# Altium PCB GPS.PcbDoc
Units mil, origin at the board's own origin, x right, y up, seen from the top; angles counter-clockwise.
Board outline 1968.5 x 2421.26 mil, 4 copper layers (Top Layer, GND, VDD, Bottom Layer); 60 components, 46 nets, 265 pads, 133 vias.
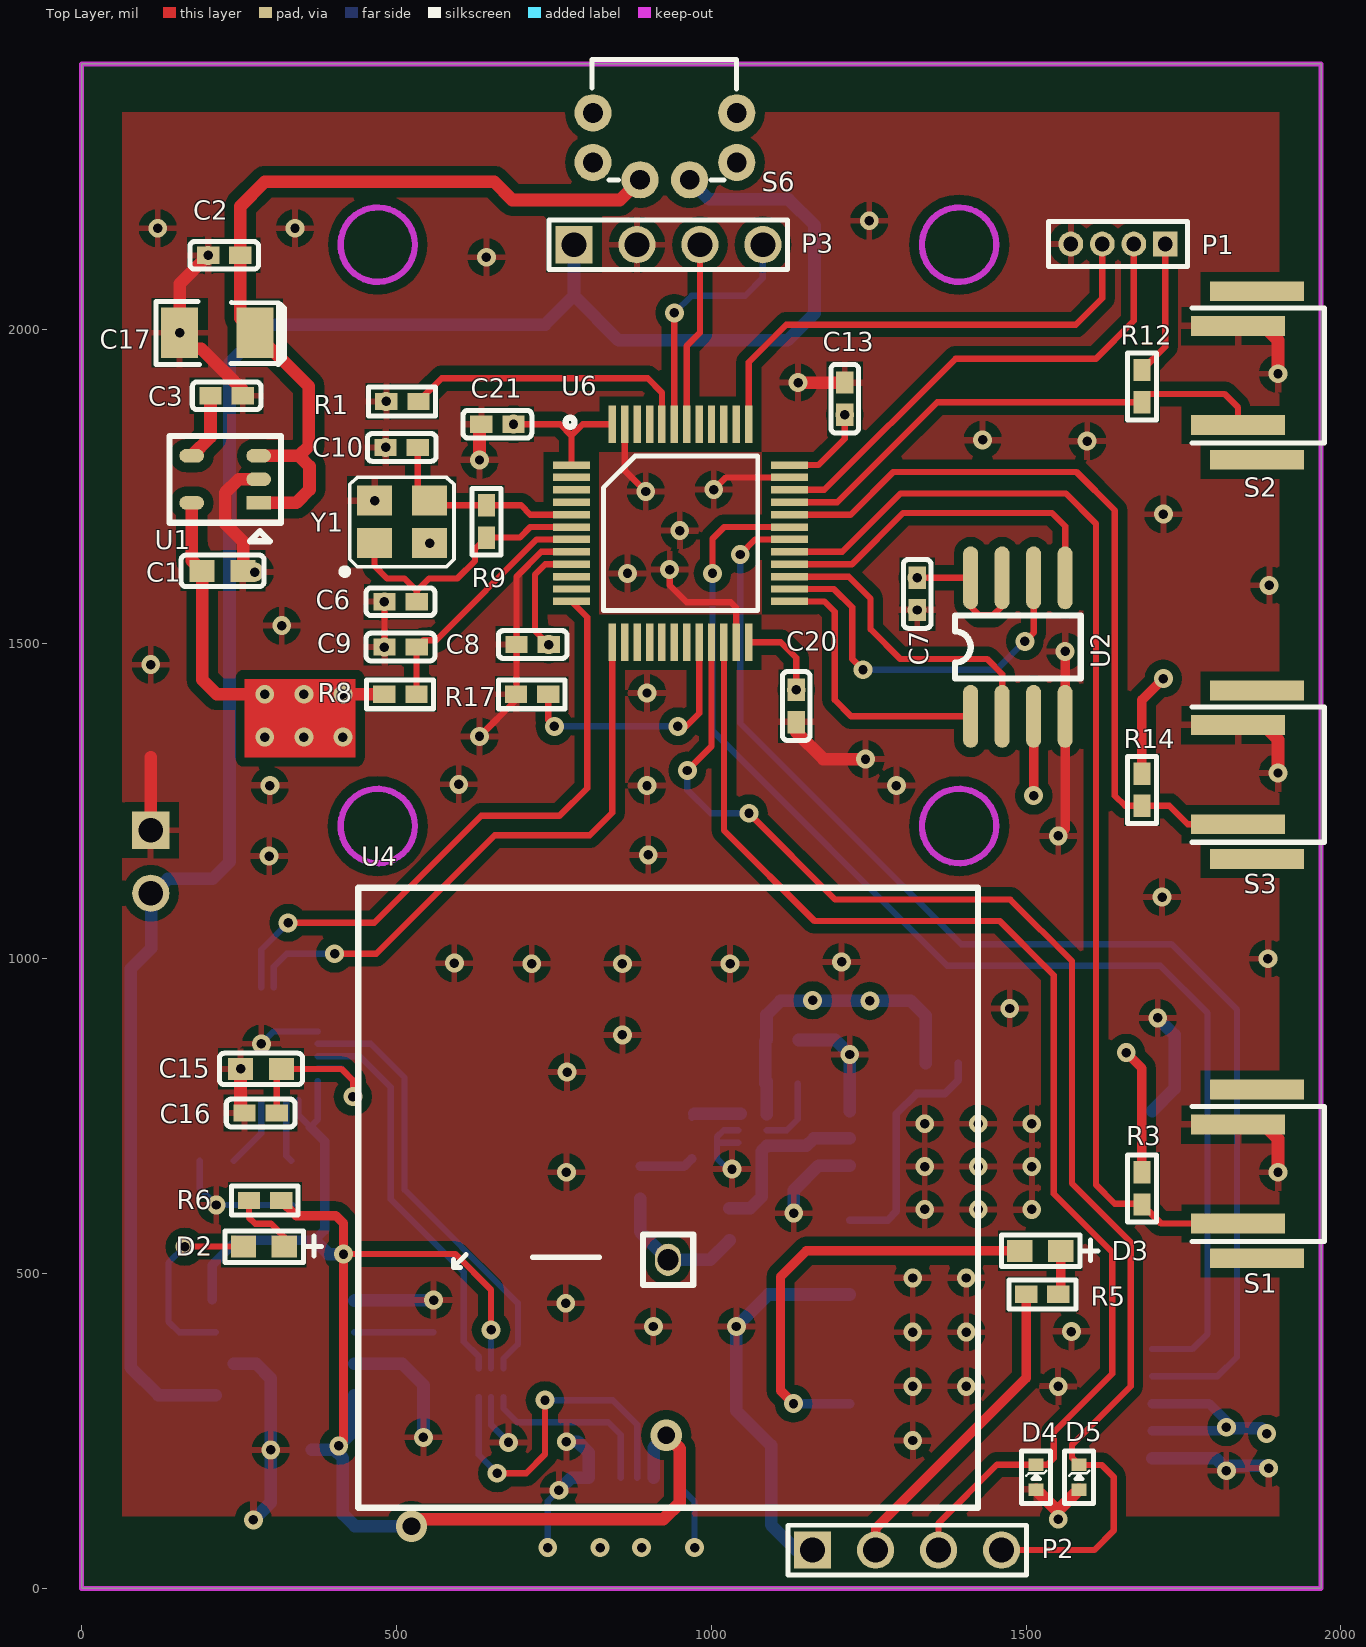
[diagram p0: Top Layer view]
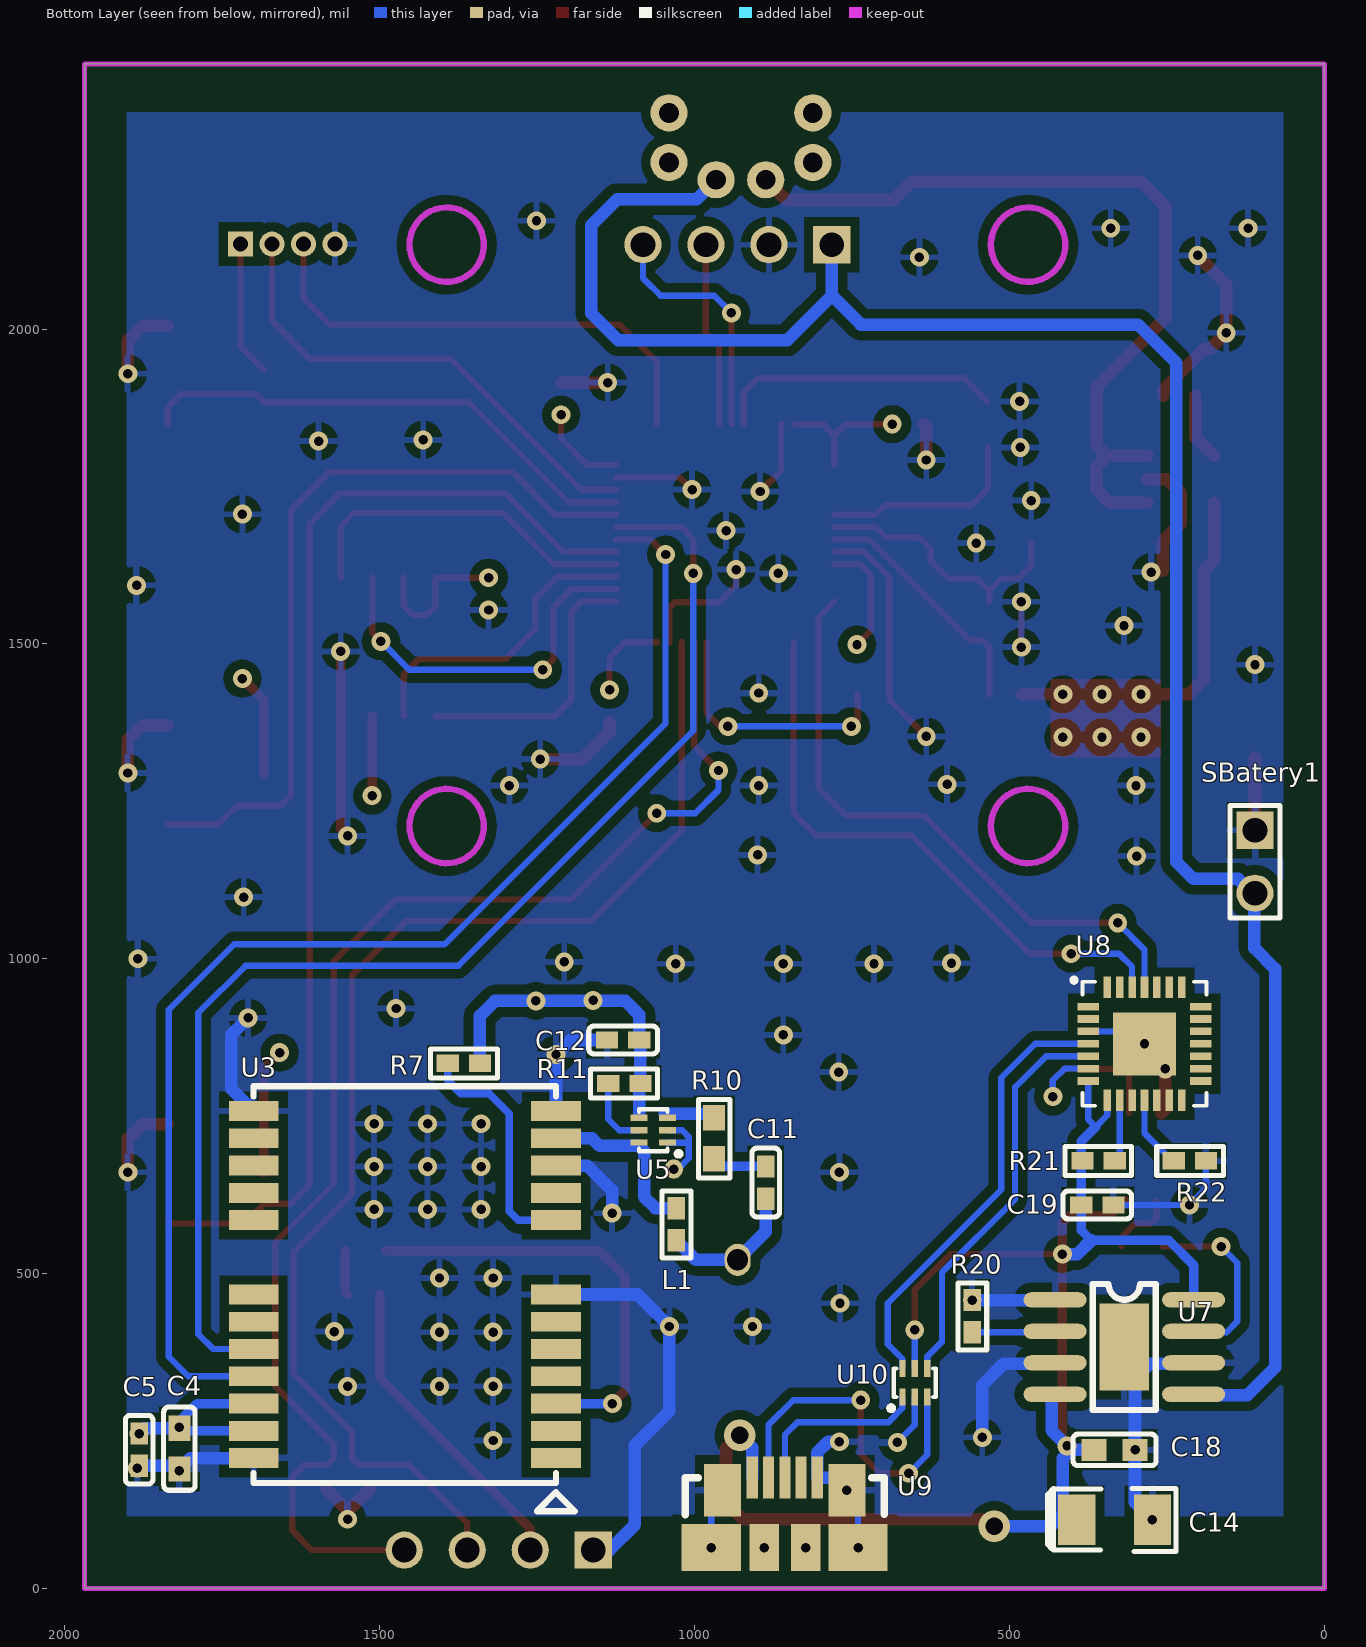
[diagram p1: Bottom Layer view, seen from below]
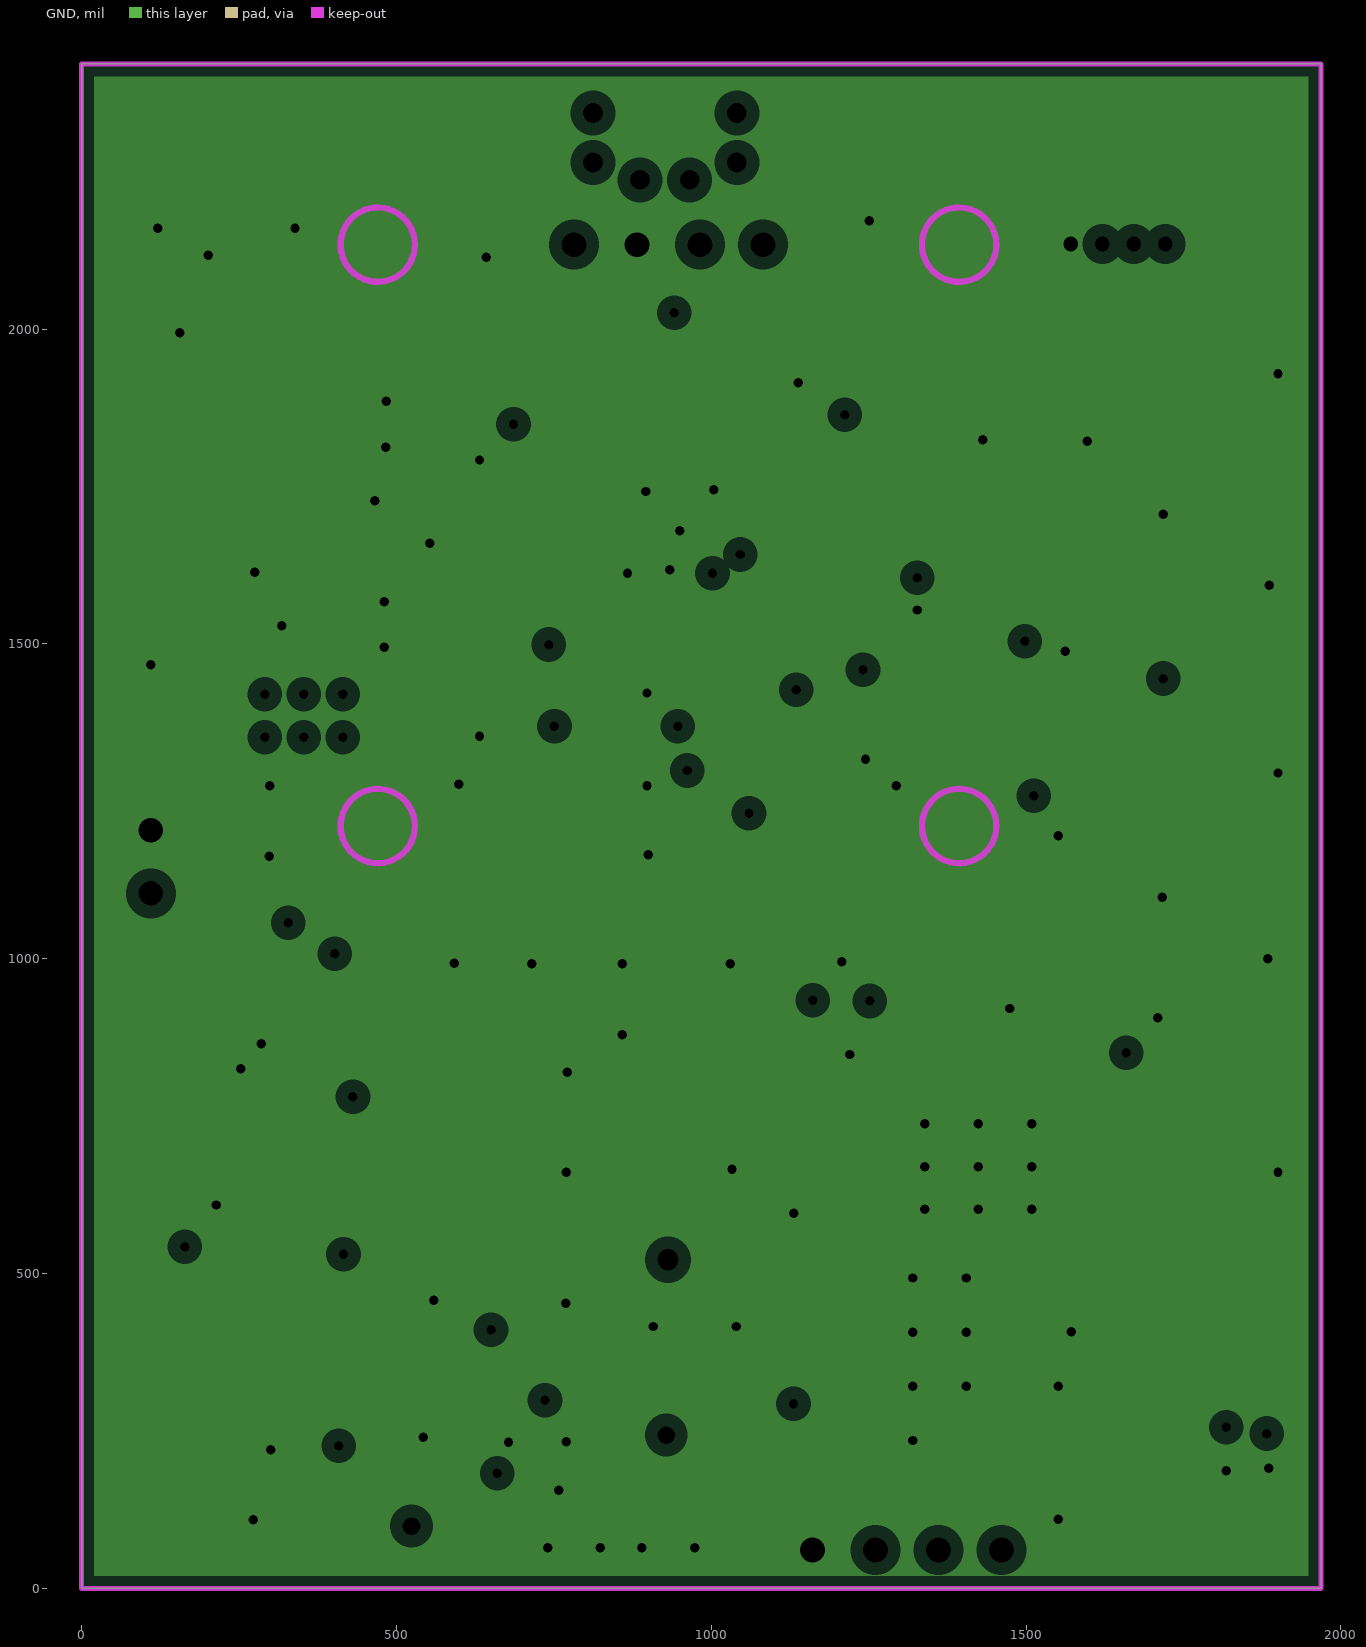
[diagram p2: GND, clearances drawn from the general rule]
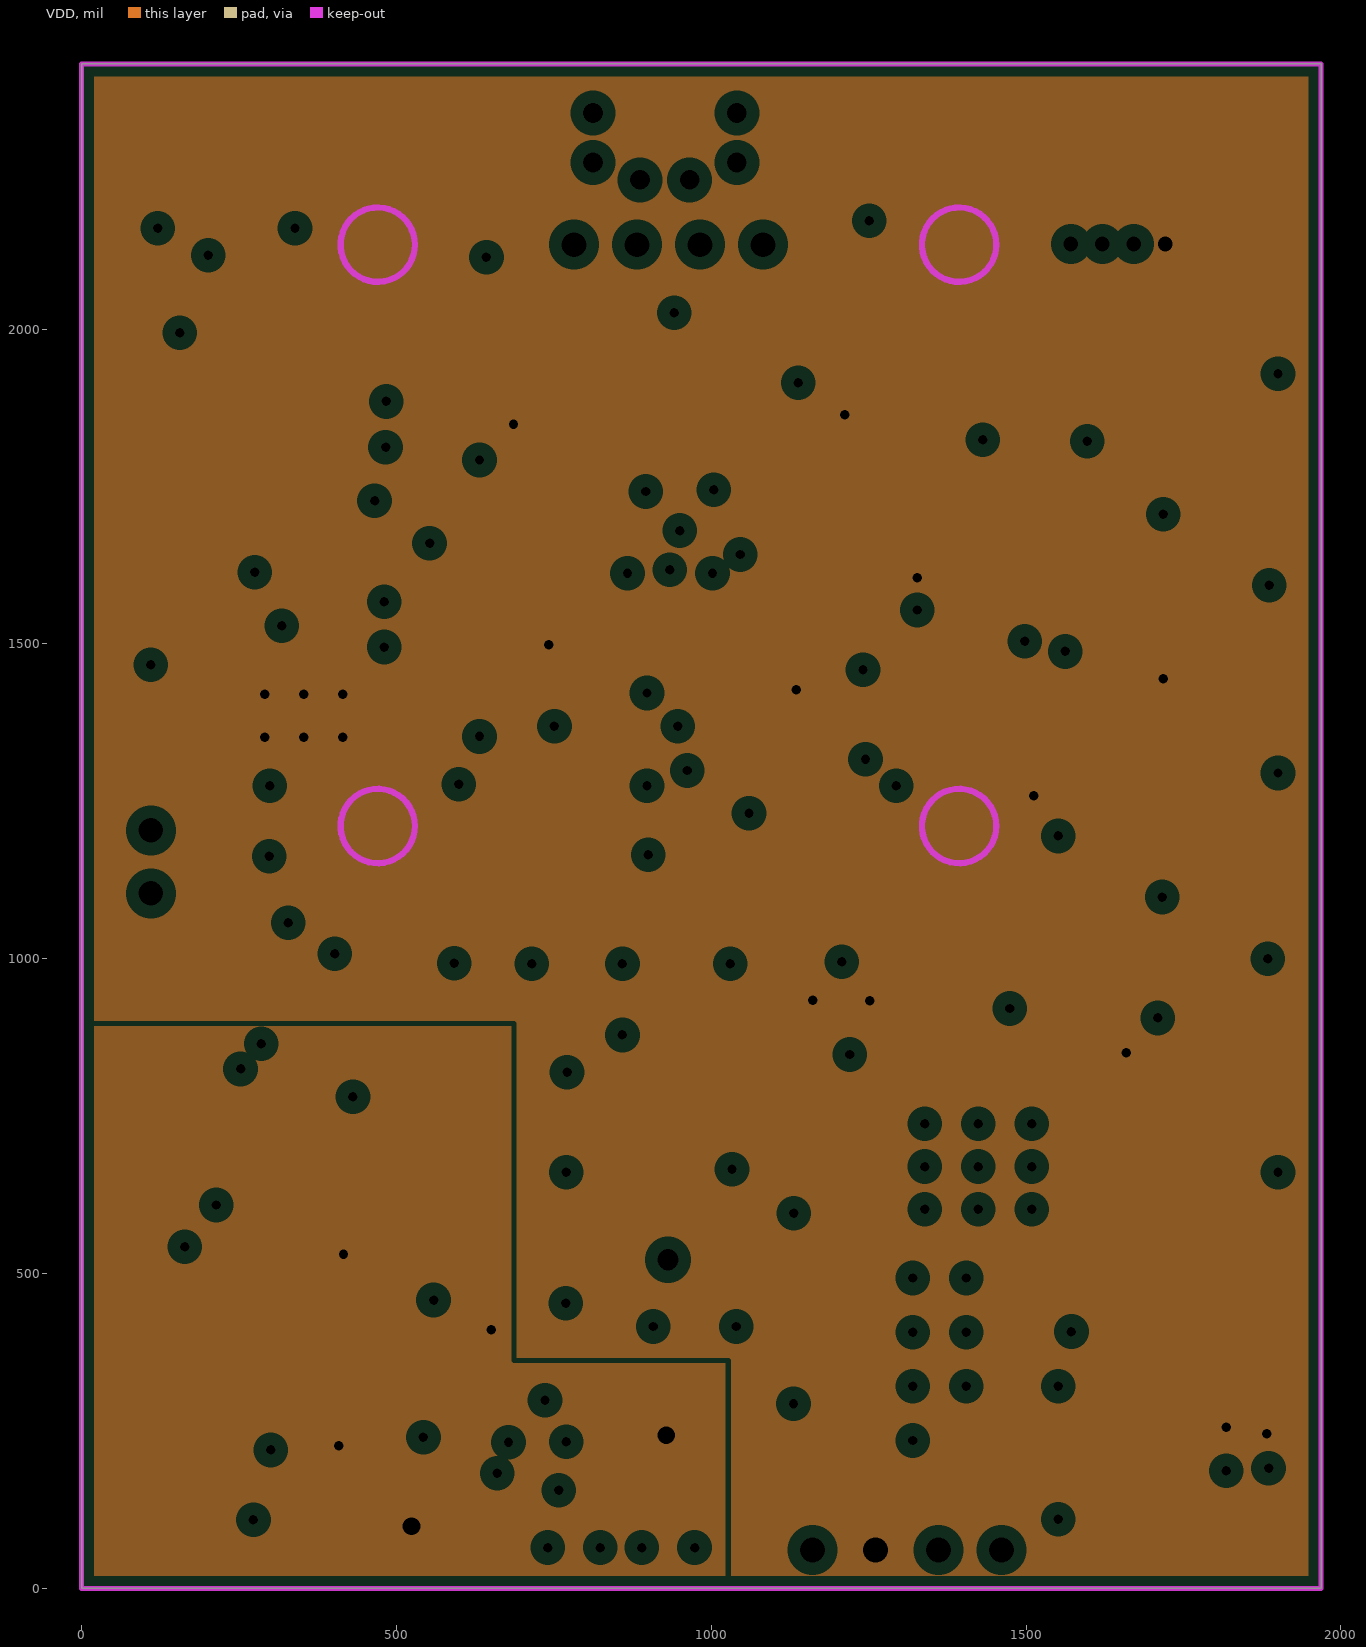
[diagram p3: VDD, clearances drawn from the general rule]

## Layer stack, top to bottom
Top Layer: signal copper 1.4
Dielectric: prepreg 12.6, FR-4, Dk 4.8
GND: plane copper 1.4, net GND
Dielectric: core 12.6, FR-4, Dk 4.8
VDD: plane copper 1.4, net VDD
Dielectric: prepreg 12.6, FR-4, Dk 4.8
Bottom Layer: signal copper 1.4

## Board outline
0,2421.26 0,0 1968.5,0 1968.5,2421.26

## Design rules (kind name [scope] priority, off if disabled: settings)
Clearance [All] p1: gap=15
ComponentClearance [All] p1 off: gap=10 collisioncheckmode=3 verticalgap=10 showdistances=FALSE
DiffPairsRouting [All] p1: maxlimit=10 minlimit=10 mostfreqgap=10 maxuncoupledlength=500
FabricationTestPointUsage TestPointUsage [All] p1: valid=0 allowmultiple=FALSE
FabricationTestpoint Testpoint [All] p1: side=3 testpointundercomponent=TRUE minsize=40 maxsize=100 preferedsize=60 minholesize=0 maxholesize=40 preferedholesize=32 testpointgrid=1 allowsidetop=TRUE allowsidebottom=TRUE usegrid=TRUE gridtolerance=0.01
PlaneClearance [All] p1: clearance=20
PlaneConnect [All] p1: planeconnectstyle=Relief reliefexpansion=20 reliefentries=4 reliefconductorwidth=10 reliefairgap=10
PolygonConnect [All] p1: connectstyle=Relief reliefconductorwidth=10 reliefentries=4 polygonreliefangle="90 Angle"
RoutingVias [All] p1: holewidth=12 width=24 viastyle="Through Hole" minholewidth=12 minwidth=24 maxholewidth=30 maxwidth=100
SilkscreenOverComponentPads [All] p1: minsilkscreentomaskgap=10
SolderMaskExpansion [All] p1: expansion=4
Width [All] p1: maxlimit=100 minlimit=8 preferedwidth=10
21 further rules are at their usual default settings.

## Classes and differential pairs
differential pair D: +D_P -D_N

## Components (designator, comment, footprint, x,y, rotation, side; value= is the part's Value field where it differs from the comment)
C1 "10uF/10V" C0603 224,1616 r180 top
C2 "0.1uF/10V" C0402 252.18,2117 r0 top
C3 "0.01uF/10V" C0402 204.82,1894 r180 top
C4 "10uF/10V" C0603 1818,222 r270 bottom
C5 "0.1uF/10V" C0402 1882,246 r90 bottom
C6 "10pF/10V" C0402 481,1567 r180 top
C7 "0.01uF/10V" C0402 1327,1605 r90 top
C8 "0.01uF/10V" C0402 742,1499 r0 top
C9 "0.01uF/10V" C0402 481,1495 r180 top
C10 "10pF/10V" C0402 482.82,1812 r180 top
C11 "470pF" C0402 887,619 r270 bottom
C12 "33nF" C0402 1139,871 r0 bottom
C13 "0.1uF/10V" C0402 1212,1915 r90 top
C14 "10uF/10V" 3528 393,109 r180 bottom
C15 "4.7uF/10V" C0603 285,825 r0 top
C16 "0.1uF/10V" C0402 310,755 r0 top
C17 "10uF/10V" 3528 275.72,1994 r180 top
C18 "10uF/10V" C0603 333,220 r180 bottom
C19 "0.1uF/10V" C0402 386,609 r0 bottom
C20 "0.01uF/10V" C0402 1135,1427 r90 top
C21 "0.01uF/10V" C0402 686,1849 r0 top
D2 "LED0" LED0603 322,543 r180 top
D3 "LED0" LED0603 1555,536 r180 top
D4 "PESD0402-140" 0402-TVS 1518,209 r90 top
D5 "PESD0402-140" 0402-TVS 1586,209 r90 top
L1 "6.8nH" R0603 969,715 r90 bottom
P1 "MHDR1X4" SIP4_1.27 1721,2135 r90 top
P2 "MHDR1X4" SIP4 1161,61 r0 top
P3 "MHDR1X4" OLED 932,2134 r0 top locked
R1 "10K/5%" R0402 535,1885 r0 top
R3 "1K/5%" R0402 1684,661 r90 top
R5 "510R" R0402 1500,467 r180 top
R6 "1K/5%" R0402 317,616 r0 top
R7 "10K/5%" R0402 1392,834 r0 bottom
R8 "10K/5%" R0402 532,1420 r0 top
R9 "1M/5%" R0402 643,1720 r90 top
R10 "50R" R0402 1029,604 r90 bottom
R11 "1K/5%" R0402 1085.82,802 r180 bottom
R12 "1K/5%" R0402 1684,1935 r90 top
R14 "1K/5%" R0402 1684,1294 r90 top
R17 "10K/5%" R0402 741,1420 r0 top
R20 "2K/5%" R0402 559,458 r90 bottom
R21 "1K/5%" R0402 332.82,679 r180 bottom
R22 "10K/5%" R0402 239,679 r0 bottom
S1 "SW-PB" KEY 1836.5,737 r270 top
S2 "SW-PB" KEY 1836.5,2005 r270 top
S3 "SW-PB" KEY 1836.5,1371 r270 top
S6 "SW-PB" KEY1 887,2237 r0 top
SBatery1 "SBatery" SIP2 110,1204 r270 bottom
U1 "TPS73633DBVR" SOP5-TPS73633DBVR 281.3,1724 r180 top
U2 "FM25V01" SO-8 1412,1385 r90 top
U3 "NEO-M8N" NEO-M8N 1220,207 r90 bottom
U4 "antenna" GPS_ANT 931.5,522 r0 top
U5 "MAX2659" UDFN 1043,708 r90 bottom
U6 "STM32F10xC8T6" LQFP-48 778,1784 r0 top
U7 "TP4056" SO-8-1 317.51,383.42 r180 bottom
U8 "CP2102" QFN-28 375,924 r180 bottom
U9 "USB" MOLEX-47346-0001 908.5,176 r180 bottom
U10 "NUF2042XV6T1" UDFN 670,304 r180 bottom
Y1 "16MHz" OSCILLATOR-3.2X2.5 509,1693.78 r90 top

## Footprints (in the part's own frame and the unit in brackets; to place one, negate y for a bottom-side part, rotate by r counter-clockwise, add the part's x,y. Pads: shape width x height; smd on the part's side, far side on the other; paste and mask are expansions set on the pad)
0402-TVS [mil]
  rect 20x24 smd: 1(-52,2) 2(-12.32,2)
  silkscreen extent -74,-21 9,25
3528 [mil]
  rect 59.05x80 smd: 1(0,0) 2(120,0)
  silkscreen extent -46,-50 157,50
C0402 [mm]
  rect 0.9x0.7 smd: 1(0,0) 2(-1.3,0)
  silkscreen extent -2.04,-0.56 0.74,0.56
C0603 [mil]
  rect 40x35 smd: 1(-32.5,0) 2(32.5,0)
  silkscreen extent -66,-25 66,25
GPS_ANT [mm]
  oval 1.05x1.3 hole 0.85: 1(0,0)
  silkscreen extent -12.5,-10 12.5,15
KEY [mm]
  rect 0.8x3.8 smd: 0(-1.4,0.762) 0(5.4,0.762) 1(0,0) 2(4,0)
  silkscreen extent -0.72,-1.85 4.72,3.48
KEY1 [mm]
  round 1.5 hole 0.8: 0(-1.9,0.7) 0(-1.9,2.7) 0(3.9,0.7) 0(3.9,2.7) 1(0,0) 2(2,0)
  silkscreen extent -1.93,0 3.89,4.85
LED0603 [mil]
  rect 40x35 smd: 1(0,0) 2(65,0)
  silkscreen extent -59,-25 94,25
LQFP-48 [mm]
  rect 1.5x0.3 smd: 1(0,0) 2(0,-0.5) 3(0,-1) 4(0,-1.5) 5(0,-2) 6(0,-2.5) 7(0,-3) 8(0,-3.5) 9(0,-4) 10(0,-4.5) 11(0,-5) 12(0,-5.5) 25(8.8,-5.5) 26(8.8,-5) 27(8.8,-4.5) 28(8.8,-4) 29(8.8,-3.5) 30(8.8,-3) 31(8.8,-2.5) 32(8.8,-2) 33(8.8,-1.5) 34(8.8,-1) 35(8.8,-0.5) 36(8.8,0)
  rect 0.3x1.5 smd: 13(1.65,-7.15) 14(2.15,-7.15) 15(2.65,-7.15) 16(3.15,-7.15) 17(3.65,-7.15) 18(4.15,-7.15) 19(4.65,-7.15) 20(5.15,-7.15) 21(5.65,-7.15) 22(6.15,-7.15) 23(6.65,-7.15) 24(7.15,-7.15) 37(7.15,1.65) 38(6.65,1.65) 39(6.15,1.65) 40(5.65,1.65) 41(5.15,1.65) 42(4.65,1.65) 43(4.15,1.65) 44(3.65,1.65) 45(3.15,1.65) 46(2.65,1.65) 47(2.15,1.65) 48(1.65,1.65)
  silkscreen extent -0.24,-5.86 7.51,1.91
MOLEX-47346-0001 [mil]
  rect 18x67 smd: 1(0,0) 2(26,0) 3(52,0) 4(77.59,0) 5(103.18,0)
  rect 94x75 smd: 6(-65,-111) 9(168.14,-111)
  rect 59x83 smd: 7(-47,-20) 8(150.43,-20)
  rect 47x75 smd: 10(84.97,-111) 11(19,-111)
  silkscreen extent -106,-59 209,0
NEO-M8N [mm]
  rect 0.8x2 smd: 1(0,0) 2(1.1,0) 3(2.2,0) 4(3.3,0) 5(4.4,0) 6(5.5,0) 7(6.6,0) 8(9.6,0) 9(10.7,0) 10(11.8,0) 11(12.9,0) 12(14,0) 13(14,12.2) 14(12.9,12.2) 15(11.8,12.2) 16(10.7,12.2) 17(9.6,12.2) 18(6.6,12.2) 19(5.5,12.2) 20(4.4,12.2) 21(3.3,12.2) 22(2.2,12.2) 23(1.1,12.2) 24(0,12.2)
  silkscreen extent -2.14,-0.76 15,12.2
OLED [mm]
  rect 1.5x1.5 hole 1: 1(-3.81,0)
  round 1.5 hole 1: 2(-1.27,0) 3(1.27,0) 4(3.81,0)
  Keep-Out Layer circle w0.254: c-11.725,-23.45 r1.5
  Keep-Out Layer circle w0.254: c11.725,0 r1.5
  Keep-Out Layer circle w0.254: c-11.725,0 r1.5
  Keep-Out Layer circle w0.254: c11.725,-23.45 r1.5
  silkscreen extent -4.81,-1 4.81,1
OSCILLATOR-3.2X2.5 [mil]
  rect 48x56 smd: 1(-33.73,43.65) 2(-33.73,-43.65) 3(33.73,-43.65) 4(33.73,43.65)
  silkscreen extent -83,-83 71,95
QFN-28 [mil]
  rect 34x12 smd mask+5: 1(0,0) 2(0,-19.68) 3(0,-39.37) 4(0,-59.06) 5(0,-78.74) 6(0,-98.43) 7(0,-118.11) 15(179,-118.11) 16(179,-98.43) 17(179,-78.74) 18(179,-59.06) 19(179,-39.37) 20(179,-19.68) 21(179,0)
  rect 12x34 smd mask+5: 8(30.44,-148.56) 9(50.13,-148.56) 10(69.82,-148.56) 11(89.5,-148.56) 12(109.18,-148.56) 13(128.87,-148.56) 14(148.56,-148.56) 22(148.56,30.44) 23(128.87,30.44) 24(109.18,30.44) 25(89.5,30.44) 26(69.82,30.44) 27(50.13,30.44) 28(30.44,30.44)
  rect 100x100 smd mask+5: 29(89.5,-59.06)
  silkscreen extent -25,-158 188,44
R0402 [mm]
  rect 0.9x0.7 smd: 1(0,0) 2(-1.3,0)
  silkscreen extent -2.01,-0.58 0.69,0.58
R0603 [mil]
  rect 40x35 smd: 1(-32.5,0) 2(32.5,0)
  silkscreen extent -63,-25 62,25
SIP2 [mm]
  rect 1.5x1.5 hole 1: 1(0,0)
  round 1.5 hole 1: 2(2.54,0)
  silkscreen extent -1,-1 3.54,1
SIP4 [mm]
  rect 1.5x1.5 hole 1: 1(0,0)
  round 1.5 hole 1: 2(2.54,0) 3(5.08,0) 4(7.62,0)
  silkscreen extent -1,-1 8.62,1
SIP4_1.27 [mm]
  rect 1x1 hole 0.6: 1(0,0)
  round 1 hole 0.6: 2(0,1.27) 3(0,2.54) 4(0,3.81)
  silkscreen extent -0.9,-0.9 0.9,4.71
SO-8 [mil]
  oval 100x24 smd: 1(0,0) 2(0,-50) 3(0,-100) 4(0,-150) 5(220,-150) 6(220,-100) 7(220,-50) 8(220,0)
  silkscreen extent 60,-175 160,25
SO-8-1 [mil]
  rect 78.74x137.8 smd: 0(0,0)
  oval 100x24 smd: 1(-110,75) 2(-110,25) 3(-110,-25) 4(-110,-75) 5(110,-75) 6(110,-25) 7(110,25) 8(110,75)
  silkscreen extent -50,-100 50,100
SOP5-TPS73633DBVR [mm]
  rect 1x0.55 smd: 1(0,0)
  oval 1x0.55 smd: 2(0,-0.95) 3(0,-1.9) 4(2.7,-1.9) 5(2.7,0)
  silkscreen extent -0.9,-2.7 3.6,1.55
UDFN [mm]
  rect 0.25x0.7 smd: 1(0,0) 2(0.5,0) 3(1,0) 4(1,1.15) 5(0.5,1.15) 6(0,1.15)
  silkscreen extent -0.55,-0.55 1.35,1.15

## Part data
C1 C2 C3 C4 C5 C6 C7 C8 C9 C10 C11 C12 C13 C15 C16 C18 C19 C20 C21: library part Cap, "Capacitor"
C14 C17: library part "Cap Pol2", "Polarized Capacitor (Axial)"
D2 D3: "Typical INFRARED GaAs LED"
D4 D5: library part "D Zener", "Zener Diode"
L1: library part Inductor, "Inductor"
P1 P2 P3: "Header, 4-Pin"
R1 R3 R5 R6 R7 R8 R9 R10 R11 R12 R14 R17 R20: library part Res2, "Resistor"
R21 R22: library part Resistor, "Resistor SMD - IEC symbol version"
S1 S2 S3 S6: "Switch"
U2: library part FM25CL64B
U5: "GPS LNA"
U6: library part STM32F100C8T6
U8: "Imported"
U9: library part MICRO_USB
Y1: library part XTAL3

## Via types
v1: diameter 30, hole 15, Top Layer to Bottom Layer, 131 vias
v2: diameter 50, hole 28, Top Layer to Bottom Layer, 2 vias

## Nets (pads, with @x,y where several pads share a name; then routed paths per layer and width w, separated by ;. In a path a pad name is that pad's centre, name@x,y a point inside that pad or via, vN(x,y) a via of type N, cw(c..) or ccw(c..) an arc to the next point about the centre after c; other vN are vias at no path point)
BAT: P3.1 S6.2 SBatery1.2 U7.5 | length 3324.5
  Bottom Layer w20: U7.5@213,307 122,307 78,351 78,984 111,1017 111,1101 137,1127 208,1127 235,1154 235,1946 296,2007 736,2007 782,2053 ; P3.1 782,2053 ; S6.2 996.74,2206 1123,2206 1164,2165 1164,2025 1121,1982 853,1982 782,2053
D_N: U8.5 U10.4 | length 641
  Bottom Layer w10: U8.5 441.74,845.26 491,796 491,618 607,502 607,392 630.63,368.37 U10.4
D_P: U8.4 U10.6 | length 706.2
  Bottom Layer w10: U8.4 459.06,864.94 513,811 513,633 693,453 693,388 670,365 U10.6
FRAM_CLK: U2.6 U6.26 | length 600.1
  Top Layer w10: U6.26 1194.85,1587.15 1224,1558 1224,1476 v1(1241,1459) ; v1(1498,1504) 1512,1518 U2.6
  Bottom Layer w10: v1(1241,1459) 1453,1459 v1(1498,1504)
FRAM_CS: U2.1 U6.25 | length 445.1
  Top Layer w10: U6.25 1179.53,1567.47 1196,1551 1196,1411 1222,1385 U2.1
FRAM_MISO: U2.2 U6.27 | length 497.4
  Top Layer w10: U6.27 1218.16,1606.84 1253,1572 1253,1523 1300,1476 1438,1476 1462,1452 U2.2
FRAM_MOSI: U2.5 U6.28 | length 562
  Top Layer w10: U6.28 1223.52,1626.52 1305,1708 1541,1708 1562,1687 U2.5
GND: C1.1 C2.2 C3.2 C4.2 C5.2 C6.1 C7.2 C8.2 C9.1 C10.1 C12.1 C13.1 C14.2 C15.1 C16.2 C17.2 C18.2 C19.2 C20.2 C21.2 D4.1 D5.1 P1.4 P2.1 P3.2 R1.2 R17.2 R20.1 R22.2 S1.1 S2.1 S3.1 SBatery1.1 U1.2 U2.4 U3.7 U3.10 U3.12 U3.13 U3.24 U5.1 U5.2 U6.8 U6.23 U6.35 U6.47 U7.0 U7.1 U7.3 U7.6 U8.3 U8.29 U9.5 U9.6 U9.7 U9.8 U9.9 U9.10 U9.11 U10.2 Y1.2 Y1.4 | length 5441.3
  Top Layer w10: v1(481,1495) v1(481,1567) ; v1(632,1353) 689.82,1410.82 R17.2 ; R17.2@690.82,1421 C8.2 690.82,1606.82 730.2,1646.2 U6.8 ; U6.47 862.65,1775.35 v1(896,1742) ; v1(934,1618) 934,1593 961,1566 1031,1566 1039.81,1557.19 U6.23 ; v1(1004,1745) 1023.32,1764.32 U6.35
  Top Layer w15: v1(1551,1195) 1562,1206 U2.4 v1(1562,1488)
  Top Layer w20: SBatery1.1 110,1320 ; v1(201,2117) 155.72,2071.72 v1(155.72,1994) 180.72,1969 190,1969 256,1903 C3.2 ; v1(252.5,825) 252.5,761.32 C16.2 ; C1.1 256.5,1662.5 228,1691 228,1740 249.4,1761.4 U1.2 ; v1(632,1792) 632,1846.18 C21.2 ; C20.2 1135,1360 1178,1317 v1(1245,1317) ; v1(1138,1915) C13.1 ; D4.1 v1@1551,122 ; v1(1551,110) v1@1551,122 ; D5.1 1551,124 v1@1551,122 ; S1.1 1877,737 1900,714 v1(1900,661) ; S3.1 1877,1371 1900,1348 v1(1900,1295) ; S2.1 1877,2005 1900,1982 v1(1900,1929)
  Bottom Layer w10: R22.2 187.82,635.18 v1(214,609) C19.2 ; v1(285.5,864.94) 305.19,884.63 U8.3 ; U10.2 650.32,259.68 v1(678,232) ; v1(740.36,65) 740.36,138.28 v1(758.08,156) ; U9.7 973.5,138 v1(973.5,65) ; 1009,704 1013,708 U5.1 ; v1(1033,666) 1026,666 1009,683 1009,717 1019.68,727.68 U5.2
  Bottom Layer w20: U7.6@241.5,357 277,357 300.5,333.5 v1(300.5,220) 300.5,136.5 v1(273,109) ; U7.3@433,357 509,357 543,323 v1(543,240) ; U7.1@433,457 434,458 v1(559,458) ; v1(758.08,156) 778.08,176 U9.5 805.32,215.68 788,233 v1(770,233) ; v1(1131,596) 1131,632 1170.57,671.57 U3.10 ; C12.1 1197,871 v1(1220,848) U3.12 ; P2.1 1135,61 1095,101 1095,227 1040,282 v1(1040,416) 1090.84,466.84 U3.7 ; U3.24 1800.5,207 C4.2 1823.32,194.82 C5.2 ; U3.13 1736,793.87 1736,879 v1(1709,906)
  other v1: 823.53,65 889.5,65 1818,187 1885,191 1320,235 1320,321 1405,321 1551,321 1320,407 1405,407 1572,408 908,416 769,453 1320,493 1405,493 1339,602 1424,602 1509,602 770,661 1339,670 1424,670 1509,670 1339,738 1424,738 1509,738 771,820 859,879 1474,921 715,992 859,992 1030,992 592,993 1207,995 1884,1000 1716,1098 298,1163 900,1165 299,1275 898,1275 1294,1275 599,1277 898,1422 110,1467 318,1529 1327,1553.82 1886,1593 867,1612 275,1614 552.65,1660.05 950,1680 1718,1706 465.35,1727.51 482.82,1812 1597,1822 1431,1824 483.82,1885 643,2114 121,2160 339,2160 1251,2172
KEY0: R3.2 S1.2 U6.29 | length 1845.8
  Top Layer w10: U6.29 1208.2,1646.2 1301,1739 1563,1739 1611,1691 1611,641 1641,611 1682.82,611 R3.2 1714.3,579.52 S1.2
KEY1: R12.2 S2.2 U6.33 | length 820.2
  Top Layer w10: U6.33 1199.94,1724.95 1358.82,1883.82 R12.2 1697.18,1897 1815,1897 1836.5,1875.5 S2.2
KEY2: R14.2 S3.2 U6.32 | length 1237.2
  Top Layer w10: U6.32 1221.26,1705.26 1289,1773 1580,1773 1641,1712 1641,1259 1657.18,1242.82 R14.2 1727.18,1242.82 1756.48,1213.52 S3.2
NetC2_1: C2.1 C17.1 S6.1 U1.1 U1.3 | length 1338.1
  Top Layer w20: U1.1 341,1724 362,1745 362,1782 345.2,1798.8 ; U1.3 345.2,1798.8 ; S6.1 855,2205 684,2205 655,2234 291.18,2234 252.18,2195 C2.1 252.18,2017.54 C17.1 361,1908.72 361,1814.61 345.2,1798.8
NetC3_1: C3.1 U1.4 | length 107.5
  Top Layer w20: U1.4 204.82,1828.62 C3.1
NetC11_1: C11.1 R10.2 U4.1 | length 225.7
  Bottom Layer w20: C11.1 887,566.5 U4.1 998.18,522 R10.2
NetC11_2: C11.2 L1.1 | length 87.1
  Bottom Layer w15: C11.2 956.68,670.18 L1.1
NetC15_2: C15.2 C16.1 U8.6 | length 309.8
  Top Layer w10: C16.1 310,817.5 C15.2 413,825 431,807 v1(431,781)
  Bottom Layer w10: U8.6 412.43,825.57 431,807 v1(431,781)
NetD2_1: D2.1 R6.2 | length 110.9
  Top Layer w10: R6.2 265.82,589.18 276,579 301,579 322,558 D2.1
NetD2_2: D2.2 U7.7 | length 304.6
  Top Layer w10: v1@164,543 D2.2
  Bottom Layer w10: v1(163.87,542.87) 138,517 138,424 155,407 U7.7@213,407
NetD3_1: D3.1 R5.2 | length 70.6
  Top Layer w15: R5.2 1555,470.82 D3.1
NetD3_2: D3.2 U3.3 | length 696.3
  Top Layer w15: v1(1130.61,293.61) 1110,314.23 1110,495 1151,536 D3.2
  Bottom Layer w15: v1(1130.61,293.61) U3.3
NetL1_2: L1.2 U5.3 | length 74.1
  Bottom Layer w10: L1.2 L1.2@969.13,747.37
  Bottom Layer w20: L1.2@973.13,754 1047,754
NetR1_1: R1.1 U6.44 | length 461.8
  Top Layer w10: R1.1 572,1922 899,1922 921.7,1899.3 U6.44
NetR11_2: R11.2 U5.5 | length 113
  Bottom Layer w10: U5.5 1119.69,727.69 1137.18,745.18 R11.2@1137.18,802
NetR17_1: R17.1 U6.20 | length 406.2
  Top Layer w10: R17.1 741,1379 v1(751,1369) ; v1(947,1369) 960,1369 980.76,1389.76 U6.20
  Bottom Layer w10: v1(751,1369) v1(947,1369)
NetR20_2: R20.2 U7.2 | length 126
  Bottom Layer w10: U7.2@433,407 R20.2@559,407
NetR21_1: R21.1 U8.9 | length 99.7
  Bottom Layer w10: U8.9 324.87,686.95 R21.1
NetR22_1: R22.1 U8.11 | length 114.7
  Bottom Layer w10: R22.1@241.5,679 285.5,723 U8.11
NetU9_2: U9.2 U10.3 | length 554.3
  Top Layer w10: v1(660,183) 706,183 736,213 v1(736,299)
  Bottom Layer w10: U10.3 630.63,212.37 v1(660,183) ; v1(736,299) 843.5,299 882.5,260 U9.2
NetU9_3: U9.3 U10.1 | length 289.9
  Bottom Layer w10: U10.1 670,286 692,264 836.5,264 856.5,244 U9.3
NRST: C9.2 R8.1 U6.7 | length 391.4
  Top Layer w10: R8.1 C9.2@532,1494.82 ; C9.2 543.18,1506 563,1506 722.89,1665.89 U6.7
OSC_IN: C10.2 R9.1 U6.5 Y1.3 | length 326.8
  Top Layer w10: C10.2 534,1746.17 560.17,1720 R9.1 698,1720 712.74,1705.26 U6.5
OSC_OUT: C6.2 R9.2 U6.6 Y1.1 | length 435.6
  Top Layer w10: Y1.1 465.35,1623.65 485,1604 512.36,1604 532.18,1584.18 ; C6.2 532.18,1584.18 ; U6.6 712.58,1685.57 695.82,1668.82 R9.2 625,1650.82 625,1632 597,1604 552,1604 532.18,1584.18
RESET_N: R7.1 U3.8 | length 381.8
  Bottom Layer w12: U3.8 1279.95,584.95 1294,599 1294,754 1326,786 1371,786 1392,807 R7.1
RF_IN: R10.1 U3.11 U5.6 | length 279.4
  Bottom Layer w20: R10.1 1062,604 1080,622 1080,694.49 1088.28,702.76 1150.76,702.76 1162.87,714.87 U3.11
RXD_G: U3.21 U6.30 | length 2032.4
  Top Layer w10: v1(1046,1642) 1069.89,1665.89 U6.30
  Bottom Layer w10: v1(1046,1642) 1046,1374 1397,1023 1731,1023 1835,919 1835,368 1803.92,336.92 U3.21
RXD_S: D4.2 P2.3 U6.22 | length 2030.4
  Top Layer w10: U6.22 1020.13,1203.87 1164,1060 1458,1060 1544,974 1544,627 1637,534 1637,341 1544,248 1544,207 1533.69,196.68 D4.2 1453.69,196.68 1361,104 P2.3
RXD_USB: U6.13 U8.26 | length 942.4
  Top Layer w10: v1(402,1008) 468,1008 656,1196 807,1196 842.96,1231.96 U6.13
  Bottom Layer w10: U8.26 305.18,987.18 326,1008 v1(402,1008)
SCL: P3.3 U6.42 | length 293.7
  Top Layer w10: U6.42 961.07,1973.07 982,1994 P3.3
SDA: P3.4 U6.43 | length 393.2
  Top Layer w10: U6.43 v1(941.39,2025.61)
  Bottom Layer w10: v1(941.39,2025.61) 968.77,2053 1054,2053 1082,2081 P3.4
SWCLK: P1.3 U6.37 | length 788.1
  Top Layer w10: U6.37 1059.5,1947.5 1119,2007 1579,2007 1621,2049 P1.3
SWDIO: P1.2 U6.34 | length 779.7
  Top Layer w10: U6.34 1179.63,1744.63 1388,1953 1611,1953 1671,2013 P1.2
TXD_G: U3.20 U6.31 | length 2014.2
  Top Layer w10: v1(1002,1612) 1002,1667 1020.58,1685.57 U6.31
  Bottom Layer w10: v1(1002,1612) 1002,1362 1375,989 1713,989 1788,914 1788,404 1764.23,380.23 U3.20
TXD_S: D5.2 P2.4 U6.21 | length 2194
  Top Layer w10: v1(962,1299) 1000.44,1337.44 U6.21 ; v1(1060,1231) 1197,1094 1475,1094 1573,996 1573,643 1666,550 1666,321 1573,228 1573,207.68 D5.2 1584.69,196 1620,196 1639,177 1639,92 1608,61 P2.4
  Bottom Layer w10: v1(962,1299) 962,1268 999,1231 v1(1060,1231)
TXD_USB: U6.12 U8.25 | length 990.6
  Top Layer w10: v1(328,1057) 465,1057 635,1227 759,1227 803,1271 803,1542.47 U6.12
  Bottom Layer w10: U8.25 285.5,1014.5 v1(328,1057)
USB-VBUS: C14.1 C18.1 C19.1 R6.1 R21.2 U7.4 U7.8 U8.7 U8.8 U9.1 U10.5 | length 2459.9
  Top Layer w10: v1(416,531) 594,531 650.31,474.69 v1(650.31,410.69)
  Top Layer w15: R6.1 341,592 404,592 416,580 v1(416,531) 416,234 v1@409.35,227.35
  Top Layer w20: v2(524,99) 535,110 924,110 950,136 950,222 v2(928.5,243.5)
  Bottom Layer w10: U8.8 344.56,751.44 363.16,732.84 375,744.68 U8.7 ; U10.5 v1(650.31,410.69)
  Bottom Layer w15: U7.8 207.51,513.51 247,553 370,553 386,569 C19.1 386.18,609.18 386.18,679 386.18,709.82 363.16,732.84
  Bottom Layer w20: C18.1 v1@402,220 ; 370,553 392,531 v1(416,531) ; U7.4@433,307 433,251 v1@402,220 ; v2(524,99) 434,99 415,118 415,207 v1@402,220 ; U9.1 908.5,223.5 v2(928.5,243.5)
  other v1: 408.56,226.56
VDD: C1.2 C4.1 C5.1 C7.1 C8.1 C12.2 C13.2 C20.1 C21.1 P1.1 P2.2 R3.1 R5.1 R7.2 R8.2 R11.1 R12.1 R14.1 U1.5 U2.3 U2.7 U2.8 U3.22 U3.23 U5.4 U6.1 U6.9 U6.24 U6.36 U6.48 | length 3553.5
  Top Layer w10: v1(686,1849) 759.96,1849 778,1830.96 ; v1(742,1499) 720,1521 720,1610 736.52,1626.52 U6.9 ; U6.1 778,1830.96 ; U6.48 796,1848.96 778,1830.96 ; U6.24 1110.5,1502.5 1135,1478 v1(1135,1427) ; U6.36 1170,1784 1212,1826 v1(1212,1863.82) ; v1(1327,1605) U2.8 1412,1559 1425,1546 1448,1546 1462,1560 U2.7 ; R12.1 1721,1972 P1.1
  Top Layer w15: P2.2 1261,95 1500,334 R5.1 ; v1(1512,1259) U2.3 ; v1(1659,851) 1684,826 R3.1 ; R14.1 1684,1411 v1(1718,1445)
  Top Layer w20: U1.5 175,1632.5 C1.2 191.5,1443.5 215,1420 R8.2
  Bottom Layer w10: C12.2@1086,869.18 C12.2
  Bottom Layer w15: U3.23 1807.31,250.31 1820.5,263.5 1790.39,293.61 U3.22
  Bottom Layer w20: R11.1@1086,802 C12.2@1086,869.18 ; C12.2 1087.82,910.82 1110,933 1317,933 1340.82,909.18 R7.2 ; 1088,753 R11.1@1088,805.35 ; C4.1 1873.5,254.5 v1(1882,246)
  other v1: 1818,256 1252,933 1161,934 291,1352 353,1352 415,1352 291,1420 353,1420 415,1420
pads on no net: S1.0 S2.0 S3.0 S6.0 U3.1 U3.2 U3.4 U3.5 U3.6 U3.9 U3.14 U3.15 U3.16 U3.17 U3.18 U3.19 U6.2 U6.3 U6.4 U6.10 U6.11 U6.14 U6.15 U6.16 U6.17 U6.18 U6.19 U6.38 U6.39 U6.40 U6.41 U6.45 U6.46 U8.1 U8.2 U8.10 U8.12 U8.13 U8.14 U8.15 U8.16 U8.17 U8.18 U8.19 U8.20 U8.21 U8.22 U8.23 U8.24 U8.27 U8.28 U9.4

## Polygon pours and split planes (outlines as drawn)
GND on Top Layer "Bottom Layer-No Net" (solid, remove dead copper, pour order 1000): 1858,115 65,115 65,515.21 65,2344 1900,2344 1902,2344 1902,115
GND on Bottom Layer "Bottom Layer-No Net" (solid, remove dead copper, pour order 1001): 1858,115 65,115 65,515.21 65,2344 1900,2344 1902,2344 1902,115
GND on GND (split plane): 1948.41,20.1 20.1,20.1 20.1,2401.16 1948.41,2401.16
VDD on VDD (split plane): 1948.41,20.1 1031.08,20.1 1031.08,362 1030.77,363.56 1029.88,364.88 1028.56,365.77 1027,366.08 691.08,366.08 691.08,897 690.77,898.56 689.88,899.88 688.56,900.77 687,901.08 20.1,901.08 20.1,2401.16 1948.41,2401.16
USB-VBUS on VDD (split plane): 682.92,362 683.23,360.44 684.12,359.12 685.44,358.23 687,357.92 1022.92,357.92 1022.92,20.1 20.1,20.1 20.1,892.92 682.92,892.92

## Keep-outs
Keep-Out Layer:
  the board outline again, w8

## Other copper
Top Layer:
  rectangle net VDD: 259,1320 435,1444
VDD (plane layer: these items are gaps in the copper):
  lines w8: 2,897 687,897 687,362 1027,362 1027,7 1024,7

## Silkscreen, mask and mechanical layers (free items; w line width, h text height)
Top Overlay:
  lines w8: 590.5,522 590.5,510 ; 601.5,510 590.5,510 ; 610.5,530 590.5,510 ; 716.5,526 822.5,526